# Altium PCB 6C-2L-1550um.PcbDoc (part 2 of 2)
Units mm, origin at the board's own origin, x right, y up, seen from the top; angles counter-clockwise.
Board outline 168.66 x 49.53 mm, 2 copper layers (Top Layer, Bottom Layer), stack 1.586 mm thick; 107 components, 120 nets, 578 pads, 231 vias.
Unrouted connection lines stored in the file: 1.
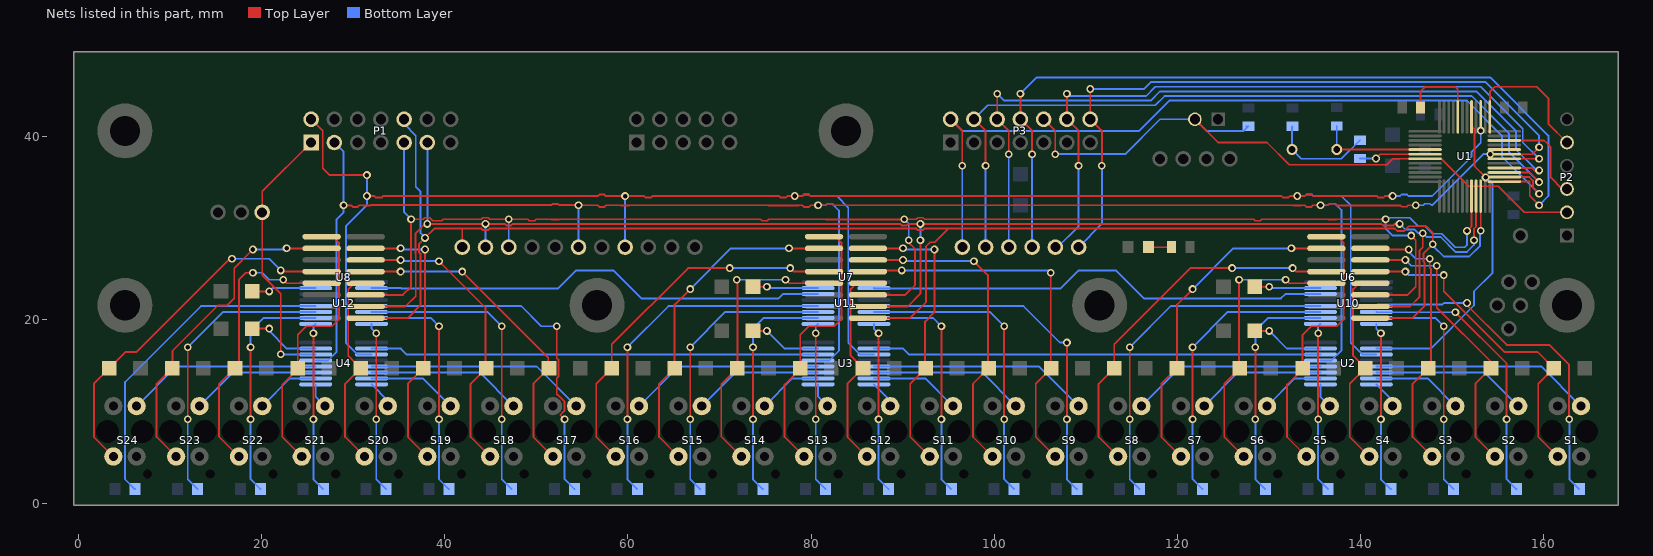
[diagram p2: the nets of this part, all layers, seen from the top]

## Via types
v1: diameter 0.85, hole 0.5, Top Layer to Bottom Layer, 231 vias

## Nets (pads, with @x,y where several pads share a name; then routed paths per layer and width w, separated by ;. In a path a pad name is that pad's centre, name@x,y a point inside that pad or via, vN(x,y) a via of type N, cw(c..) or ccw(c..) an arc to the next point about the centre after c; other vN are vias at no path point) (continued)
infra_OE: P1.3 pad.46 U1.32 U2.13 U3.13 U4.13 | length 203.2
  Top Layer w0.2: v1(28.956,32.512) 28.763,32.512 28.772,32.503 29.788,32.503 29.946,32.345 30.506,32.345 30.682,32.521 31.053,32.521 31.071,32.503 31.921,32.503 31.948,32.53 51.65,32.53 51.79,32.67 52.35,32.67 52.49,32.53 54.136,32.53 54.145,32.521 v1(54.61,32.521) 56.685,32.521 56.87,32.336 57.43,32.336 57.615,32.521 59.238,32.521 59.265,32.494 60.115,32.494 60.142,32.521 75.355,32.521 75.373,32.503 78.657,32.503 78.666,32.512 79.055,32.512 79.222,32.345 79.782,32.345 79.949,32.512 v1(80.772,32.512) 81.595,32.512 81.762,32.679 82.322,32.679 82.489,32.512 128.344,32.512 128.353,32.521 132.653,32.521 132.671,32.503 133.521,32.503 133.539,32.521 133.91,32.521 134.086,32.345 134.646,32.345 134.813,32.512 v1(135.636,32.512) 136.459,32.512 136.626,32.679 137.186,32.679 137.362,32.503 144.355,32.503 144.5,32.358 145.06,32.358 145.214,32.512 v1(146.05,32.512) ; v1(154.178,38.1) 154.674,38.596 U1.32@155.709,38.596
  Bottom Layer w0.2: U4.13@25.906,15.565 27.249,15.565 28.194,16.51 28.194,30.988 28.956,31.75 v1(28.956,32.512) 28.956,38.354 P1.3@27.94,39.37 ; pad.46@54.61,27.94 v1(54.61,32.521) ; U3.13@80.77,15.565 81.971,15.565 83.058,16.652 83.058,31.943 82.322,32.679 81.762,32.679 81.595,32.512 v1(80.772,32.512) ; U2.13@135.634,15.565 136.835,15.565 137.922,16.652 137.922,32.004 137.247,32.679 136.626,32.679 136.459,32.512 v1(135.636,32.512) ; v1(146.05,32.512) 146.873,32.512 147.04,32.679 147.6,32.679 147.767,32.512 147.828,32.512 153.416,38.1 v1(154.178,38.1)
infra_SCK: P1.2 pad.48 U1.39 U2.3 U3.3 U4.3 | length 217
  Top Layer w0.2: P1.2@25.4,41.91 26.67,40.64 26.67,36.576 27.432,35.814 v1(31.496,35.814) ; v1(31.496,33.528) 32.319,33.528 32.486,33.361 33.107,33.361 33.274,33.528 33.602,33.528 33.611,33.519 54.158,33.519 54.185,33.546 55.035,33.546 55.062,33.519 56.703,33.519 56.87,33.686 57.43,33.686 57.597,33.519 v1(59.69,33.519) 61.792,33.519 61.95,33.361 62.51,33.361 62.668,33.519 76.524,33.519 76.682,33.361 77.242,33.361 77.409,33.528 v1(78.232,33.528) 79.055,33.528 79.222,33.695 79.782,33.695 79.949,33.528 80.338,33.528 80.347,33.537 84.647,33.537 84.665,33.519 85.515,33.519 85.533,33.537 131.37,33.537 131.546,33.361 132.106,33.361 132.273,33.528 v1(133.096,33.528) 133.919,33.528 134.086,33.695 134.646,33.695 134.822,33.519 135.193,33.519 135.211,33.537 136.061,33.537 136.079,33.519 141.395,33.519 141.404,33.528 141.793,33.528 141.96,33.361 142.52,33.361 142.687,33.528 v1(143.51,33.528) ; v1(153.134,40.668) U1.39@153.134,42.171
  Bottom Layer w0.2: v1(31.496,35.814) v1(31.496,33.528) 31.496,32.512 29.21,30.226 29.21,17.526 30.521,16.215 U4.3@32.006,16.215 ; pad.48@59.69,27.94 v1(59.69,33.519) ; v1(78.232,33.528) 79.055,33.528 79.222,33.695 79.782,33.695 79.949,33.528 80.338,33.528 80.347,33.537 82.795,33.537 84.074,32.258 84.074,17.526 85.385,16.215 U3.3@86.87,16.215 ; v1(133.096,33.528) 133.919,33.528 134.086,33.695 134.707,33.695 134.865,33.537 136.122,33.537 136.131,33.528 137.922,33.528 138.938,32.512 138.938,17.526 140.249,16.215 U2.3@141.734,16.215 ; v1(143.51,33.528) 144.32,33.528 144.5,33.708 145.06,33.708 145.24,33.528 145.616,33.528 145.625,33.537 146.475,33.537 146.484,33.528 147.828,33.528 152.146,37.846 152.146,38.354 153.134,39.342 v1(153.134,40.668)
infra_SDO: U1.41 U2.2 | length 35
  Top Layer w0.2: U1.41@152.134,42.171 152.134,41.16 152.459,40.835 152.459,36.771 v1(153.67,35.56)
  Bottom Layer w0.2: U2.2@141.734,16.865 147.675,16.865 152.4,21.59 152.4,23.114 154.432,25.146 154.432,34.798 v1(153.67,35.56)
infra_SDO_to_front: P1.1 pad.40 U4.14 | length 30
  Top Layer w0.2: v1(22.098,16.256) 22.098,22.86 20.066,24.892 pad.40@20.066,31.75 20.066,34.036 P1.1@25.4,39.37
  Bottom Layer w0.2: v1(22.098,16.256) 22.139,16.215 U4.14@25.906,16.215
Main_MISO: P3.4 pad.12 U1.27 | length 86.6
  Top Layer w0.2: P3.4@97.79,41.91 99.06,40.64 v1(99.06,36.83) ; U1.27@155.709,36.096 158.468,36.096 v1(159.512,35.052)
  Bottom Layer w0.2: P3.4@97.79,41.91 99.314,43.434 117.602,43.434 118.618,44.45 152.146,44.45 156.21,40.386 156.21,38.354 v1(159.512,35.052) ; pad.12@99.06,27.94 v1(99.06,36.83)
Main_MOSI: P3.6 pad.13 U1.28 | length 85.9
  Top Layer w0.2: v1(100.33,44.704) P3.6@100.33,41.91 101.6,40.64 v1(101.6,38.1) ; U1.28@155.709,36.596 158.73,36.596 159.004,36.322 v1(159.512,36.322)
  Bottom Layer w0.2: v1(100.33,44.704) 101.092,43.942 117.094,43.942 118.11,44.958 152.654,44.958 156.972,40.64 156.972,38.608 159.258,36.322 v1(159.512,36.322) ; pad.13@101.6,27.94 v1(101.6,38.1)
Main_SCK: P3.2 pad.11 U1.26 | length 91.2
  Top Layer w0.2: P3.2@95.25,41.91 96.52,40.64 v1(96.52,36.83) ; U1.26@155.709,35.596 158.46,35.596 158.837,35.219 158.837,34.457 v1(159.512,33.782)
  Bottom Layer w0.2: P3.2@95.25,41.91 96.52,40.64 115.824,40.64 119.126,43.942 151.638,43.942 155.448,40.132 155.448,37.846 v1(159.512,33.782) ; pad.11@96.52,27.94 v1(96.52,36.83)
Main_SS: P3.8 pad.14 U1.25 | length 92.1
  Top Layer w0.2: v1(102.87,44.704) P3.8@102.87,41.91 104.14,40.64 v1(104.14,38.1) ; U1.25@155.709,35.096 158.452,35.096 158.487,35.061 158.487,33.537 v1(159.512,32.512)
  Bottom Layer w0.2: v1(102.87,44.704) 104.648,46.482 154.178,46.482 160.528,40.132 160.528,33.528 v1(159.512,32.512) ; pad.14@104.14,27.94 v1(104.14,38.1)
NetC1_1: C1.1 U1.5 X1.2 | length 12.2
  Top Layer w0.2: X1.2@137.414,38.608 137.426,38.596 U1.5@147.059,38.596
  Bottom Layer w0.2: X1.2@137.414,38.608 C1.1@137.414,41.18
NetC2_1: C2.1 R1.1 X1.1 | length 11.2
  Bottom Layer w0.2: C2.1@132.588,41.148 132.534,41.094 X1.1@132.534,38.608 133.55,37.592 137.922,37.592 R1.1@139.954,39.624
NetD1_2: D1.K U10.5 | length 38.1
  Top Layer w0.2: v1(151.638,21.844) 151.638,21.59 155.956,17.272 160.64,17.272 162.794,15.118 162.794,9.164 v1(162.814,9.144)
  Bottom Layer w0.2: U10.5@141.805,21.59 141.909,21.694 148.948,21.694 149.098,21.844 v1(151.638,21.844) ; v1(162.814,9.144) 162.814,2.608 D1.K@163.898,1.524
NetD2_2: D2.K U10.6 | length 30.7
  Top Layer w0.2: v1(150.368,20.828) 155.956,15.24 v1(155.956,9.144)
  Bottom Layer w0.2: U10.6@141.734,20.869 141.775,20.828 v1(150.368,20.828) ; v1(155.956,9.144) 155.956,2.608 D2.K@157.04,1.524
NetD3_2: D3.K U10.7 | length 26
  Top Layer w0.2: v1(149.098,9.144) v1(149.098,19.304)
  Bottom Layer w0.2: U10.7@141.734,20.219 148.183,20.219 v1(149.098,19.304) ; v1(149.098,9.144) 149.098,2.608 D3.K@150.182,1.524
NetD4_2: D4.K U10.8 | length 18.7
  Top Layer w0.2: v1(142.24,9.144) v1(142.24,18.542)
  Bottom Layer w0.2: U10.8@141.734,19.569 141.734,19.048 v1(142.24,18.542) ; v1(142.24,9.144) 142.24,2.608 D4.K@143.324,1.524
NetD5_2: D5.K U10.9 | length 18.6
  Top Layer w0.2: v1(135.382,9.144) v1(135.382,18.542)
  Bottom Layer w0.2: v1(135.382,9.144) 135.382,2.608 D5.K@136.466,1.524 ; v1(135.382,18.542) 135.382,19.317 U10.9@135.634,19.569
NetD6_2: D6.K U10.10 | length 25.4
  Top Layer w0.2: v1(128.524,9.144) v1(128.524,17.018)
  Bottom Layer w0.2: v1(128.524,9.144) 128.524,2.608 D6.K@129.608,1.524 ; v1(128.524,17.018) 128.524,18.796 129.947,20.219 U10.10@135.634,20.219
NetD7_2: D7.K U10.11 | length 31.5
  Top Layer w0.2: v1(121.666,9.144) v1(121.666,17.018)
  Bottom Layer w0.2: v1(121.666,9.144) 121.666,2.608 D7.K@122.75,1.524 ; v1(121.666,17.018) 125.517,20.869 U10.11@135.634,20.869
NetD8_2: D8.K U10.12 | length 38.6
  Top Layer w0.2: v1(114.808,9.144) v1(114.808,17.018)
  Bottom Layer w0.2: v1(114.808,9.144) 114.808,2.608 D8.K@115.892,1.524 ; v1(114.808,17.018) 119.309,21.519 U10.12@135.634,21.519
NetD9_2: D9.K U11.5 | length 39.2
  Top Layer w0.2: v1(107.95,9.144) v1(107.95,17.526)
  Bottom Layer w0.2: U11.5@86.87,21.519 103.195,21.519 107.188,17.526 v1(107.95,17.526) ; v1(107.95,9.144) 107.95,2.608 D9.K@109.034,1.524
NetD10_2: D10.K U11.6 | length 33.1
  Top Layer w0.2: v1(101.092,9.144) v1(101.092,19.304)
  Bottom Layer w0.2: U11.6@86.87,20.869 99.527,20.869 v1(101.092,19.304) ; v1(101.092,9.144) 101.092,2.608 D10.K@102.176,1.524
NetD11_2: D11.K U11.7 | length 26
  Top Layer w0.2: v1(94.234,9.144) v1(94.234,19.304)
  Bottom Layer w0.2: U11.7@86.87,20.219 93.319,20.219 v1(94.234,19.304) ; v1(94.234,9.144) 94.234,2.608 D11.K@95.318,1.524
NetD12_2: D12.K U11.8 | length 18.7
  Top Layer w0.2: v1(87.376,9.144) v1(87.376,18.542)
  Bottom Layer w0.2: U11.8@86.87,19.569 86.87,19.048 v1(87.376,18.542) ; v1(87.376,9.144) 87.376,2.608 D12.K@88.46,1.524
NetD13_2: D13.K U11.9 | length 18.6
  Top Layer w0.2: v1(80.518,9.144) v1(80.518,18.542)
  Bottom Layer w0.2: v1(80.518,9.144) 80.518,2.608 D13.K@81.602,1.524 ; v1(80.518,18.542) 80.518,19.317 U11.9@80.77,19.569
NetD14_2: D14.K U11.10 | length 25.6
  Top Layer w0.2: v1(73.66,9.144) v1(73.66,17.018)
  Bottom Layer w0.2: v1(73.66,9.144) 73.66,2.608 D14.K@74.744,1.524 ; v1(73.66,17.018) 73.66,19.05 74.829,20.219 U11.10@80.77,20.219
NetD15_2: D15.K U11.11 | length 31.5
  Top Layer w0.2: v1(66.802,9.144) v1(66.802,17.018)
  Bottom Layer w0.2: v1(66.802,9.144) 66.802,2.608 D15.K@67.886,1.524 ; v1(66.802,17.018) 70.653,20.869 U11.11@80.77,20.869
NetD16_2: D16.K U11.12 | length 38.6
  Top Layer w0.2: v1(59.944,9.144) v1(59.944,17.018)
  Bottom Layer w0.2: v1(59.944,9.144) 59.944,2.608 D16.K@61.028,1.524 ; v1(59.944,17.018) 64.445,21.519 U11.12@80.77,21.519
NetD17_2: D17.K U12.5 | length 40.4
  Top Layer w0.2: v1(52.237,19.304) 52.237,15.782 52.29,15.782 52.436,15.636 52.436,13.828 52.29,13.682 52.237,13.682 52.237,11.83 52.334,11.83 53.066,11.098 53.066,10.062 52.617,9.613 v1(53.086,9.144)
  Bottom Layer w0.2: U12.5@32.006,21.519 48.331,21.519 50.546,19.304 v1(52.237,19.304) ; v1(53.086,9.144) 53.086,2.608 D17.K@54.17,1.524
NetD18_2: D18.K U12.6 | length 33.1
  Top Layer w0.2: v1(46.228,9.144) v1(46.228,19.304)
  Bottom Layer w0.2: U12.6@32.006,20.869 44.663,20.869 v1(46.228,19.304) ; v1(46.228,9.144) 46.228,2.608 D18.K@47.312,1.524
NetD19_2: D19.K U12.7 | length 26
  Top Layer w0.2: v1(39.37,9.144) v1(39.37,19.304)
  Bottom Layer w0.2: U12.7@32.006,20.219 38.455,20.219 v1(39.37,19.304) ; v1(39.37,9.144) 39.37,2.608 D19.K@40.454,1.524
NetD20_2: D20.K U12.8 | length 18.7
  Top Layer w0.2: v1(32.512,9.144) v1(32.512,18.542)
  Bottom Layer w0.2: U12.8@32.006,19.569 32.006,19.048 v1(32.512,18.542) ; v1(32.512,9.144) 32.512,2.608 D20.K@33.596,1.524
NetD21_2: D21.K U12.9 | length 18.6
  Top Layer w0.2: v1(25.654,9.144) v1(25.654,18.542)
  Bottom Layer w0.2: v1(25.654,9.144) 25.654,2.608 D21.K@26.738,1.524 ; v1(25.654,18.542) 25.654,19.317 U12.9@25.906,19.569
NetD22_2: D22.K U12.10 | length 25.4
  Top Layer w0.2: v1(18.796,9.144) v1(18.796,17.018)
  Bottom Layer w0.2: v1(18.796,9.144) 18.796,2.608 D22.K@19.88,1.524 ; v1(18.796,17.018) 18.796,18.796 20.219,20.219 U12.10@25.906,20.219
NetD23_2: D23.K U12.11 | length 31.5
  Top Layer w0.2: v1(11.938,9.144) v1(11.938,17.018)
  Bottom Layer w0.2: v1(11.938,9.144) 11.938,2.608 D23.K@13.022,1.524 ; v1(11.938,17.018) 15.789,20.869 U12.11@25.906,20.869
NetD24_2: D24.K U12.12 | length 36.4
  Bottom Layer w0.2: D24.K@6.164,1.524 5.08,2.608 5.08,13.208 13.391,21.519 U12.12@25.906,21.519
NetD25_1: D25.A R9.1 | length 2.5
  Top Layer w0.2: D25.A@116.84,27.94 R9.1@119.38,27.94
NetR1_2: R1.2 U1.6 | length 7.3
  Top Layer w0.2: v1(141.7,37.624) 142.172,38.096 U1.6@147.059,38.096
  Bottom Layer w0.2: R1.2@139.954,37.624 v1(141.7,37.624)
NetR2_2: R2.2 U2.15 | length 8
  Top Layer w0.2: R2.2@128.446,18.796 v1(130.048,18.796)
  Bottom Layer w0.2: v1(130.048,18.796) 131.979,16.865 U2.15@135.634,16.865
NetR3_2: R3.2 U3.15 | length 7.9
  Top Layer w0.2: R3.2@73.66,18.796 v1(75.184,18.796)
  Bottom Layer w0.2: v1(75.184,18.796) 77.115,16.865 U3.15@80.77,16.865
NetR4_2: R4.2 U4.15 | length 8
  Top Layer w0.2: R4.2@18.972,19.05 v1(20.828,19.05)
  Bottom Layer w0.2: v1(20.828,19.05) 20.828,18.796 22.759,16.865 U4.15@25.906,16.865
NetR5_1: R5.1 U1.44 | length 9.2
  Top Layer w0.2: R5.1@146.558,43.18 146.558,44.958 147.066,45.466 150.368,45.466 150.634,45.2 U1.44@150.634,42.171
NetR6_2: R6.2 U10.15 | length 7.3
  Top Layer w0.2: R6.2@128.446,23.622 v1(130.048,23.622)
  Bottom Layer w0.2: v1(130.048,23.622) 130.201,23.469 U10.15@135.634,23.469
NetR7_2: R7.2 U11.15 | length 7.2
  Top Layer w0.2: R7.2@73.66,23.622 v1(75.184,23.622)
  Bottom Layer w0.2: v1(75.184,23.622) 75.337,23.469 U11.15@80.77,23.469
NetR8_2: R8.2 U12.15 | length 7.1
  Top Layer w0.2: R8.2@18.972,23.114 v1(20.828,23.114)
  Bottom Layer w0.2: v1(20.828,23.114) 21.183,23.469 U12.15@25.906,23.469
NetR10_1: R10.1 S1.3 U6.13 | length 36.7
  Top Layer w0.2: U6.13@141.084,25.273 v1(144.907,25.273) ; v1(149.098,24.892) 149.098,23.114 155.702,16.51 159.336,16.51 R10.1@161.114,14.732 159.414,13.032 159.414,7.209 S1.3@161.544,5.08 S1.3@161.544,5.08
  Bottom Layer w0.2: v1(144.907,25.273) 145.288,24.892 v1(149.098,24.892)
NetR11_1: R11.1 S2.3 U6.14 | length 32.4
  Top Layer w0.2: U6.14@141.084,26.543 v1(144.907,26.543) ; v1(148.336,25.908) 148.336,21.336 154.256,15.416 R11.1@154.256,14.732 152.556,13.032 152.556,7.209 S2.3@154.686,5.08 S2.3@154.686,5.08
  Bottom Layer w0.2: v1(144.907,26.543) 145.542,25.908 v1(148.336,25.908)
NetR12_1: R12.1 S3.3 U6.15 | length 30.7
  Top Layer w0.2: U6.15@141.084,27.813 140.957,27.686 v1(145.288,27.686) ; v1(147.574,26.67) 147.574,25.715 147.701,25.588 147.701,15.035 145.698,13.032 145.698,7.209 S3.3@147.828,5.08 S3.3@147.828,5.08
  Bottom Layer w0.2: v1(145.288,27.686) 145.288,27.432 146.05,26.67 v1(147.574,26.67)
NetR13_1: R13.1 S4.3 U6.12 | length 22.6
  Top Layer w0.2: S4.3@140.97,5.08 S4.3@140.97,5.08 138.84,7.209 138.84,13.032 R13.1@140.54,14.732 139.192,16.08 139.192,23.368 139.827,24.003 U6.12@141.084,24.003
NetR14_1: R14.1 S5.3 U6.1 | length 30.6
  Top Layer w0.2: R14.1@133.682,14.732 133.682,18.366 134.62,19.304 137.414,19.304 138.176,20.066 138.176,28.448 137.541,29.083 U6.1@136.284,29.083 ; R14.1@133.731,14.683 131.982,12.934 131.982,7.209 S5.3@134.112,5.08 S5.3@134.112,5.08
NetR15_1: R15.1 S6.3 U6.5 | length 30.6
  Top Layer w0.2: v1(126.746,24.384) 126.746,14.81 R15.1@126.824,14.732 125.124,13.032 125.124,7.209 S6.3@127.254,5.08 S6.3@127.254,5.08 ; v1(131.826,24.384) 132.207,24.003 U6.5@136.284,24.003
  Bottom Layer w0.2: v1(126.746,24.384) v1(131.826,24.384)
NetR16_1: R16.1 S7.3 U6.2 | length 37
  Top Layer w0.2: S7.3@120.396,5.08 S7.3@120.396,5.08 118.266,7.209 118.266,13.032 R16.1@119.966,14.732 119.966,21.668 v1(121.666,23.368) ; v1(132.461,27.813) U6.2@136.284,27.813
  Bottom Layer w0.2: v1(121.666,23.368) 126.111,27.813 v1(132.461,27.813)
NetR17_1: R17.1 S8.3 U6.4 | length 40.9
  Top Layer w0.2: S8.3@113.538,5.08 S8.3@113.538,5.08 111.408,7.209 111.408,13.032 R17.1@113.108,14.732 113.108,17.326 121.436,25.654 v1(125.984,25.654) ; v1@132.588,25.4 v1(132.588,25.654) 132.969,25.273 U6.4@136.284,25.273
  Bottom Layer w0.2: v1(125.984,25.654) v1(132.588,25.654)
NetR18_1: R18.1 S9.3 U7.13 | length 41.8
  Top Layer w0.2: U7.13@86.22,25.273 86.347,25.4 v1(89.916,25.4) ; v1(106.172,25.146) 106.172,14.732 R18.1@106.25,14.732 104.55,13.032 104.55,7.209 S9.3@106.68,5.08 S9.3@106.68,5.08
  Bottom Layer w0.2: v1(89.916,25.4) 105.918,25.4 v1(106.172,25.146)
NetR19_1: R19.1 S10.3 U7.14 | length 35.1
  Top Layer w0.2: U7.14@86.22,26.543 v1(90.043,26.543) ; v1(97.79,26.416) 99.314,24.892 99.314,14.654 97.692,13.032 97.692,7.209 S10.3@99.822,5.08 S10.3@99.822,5.08
  Bottom Layer w0.2: v1(90.043,26.543) 90.17,26.416 v1(97.79,26.416)
NetR20_1: R20.1 S11.3 U7.15 | length 31.9
  Top Layer w0.2: U7.15@86.22,27.813 v1(90.043,27.813) ; S11.3@92.964,5.08 S11.3@92.964,5.08 90.834,7.209 90.834,13.032 92.456,14.654 92.456,19.812 93.472,20.828 v1(93.472,27.686)
  Bottom Layer w0.2: v1(90.043,27.813) 90.17,27.686 v1(93.472,27.686)
NetR21_1: R21.1 S12.3 U7.12 | length 22.6
  Top Layer w0.2: S12.3@86.106,5.08 S12.3@86.106,5.08 83.976,7.209 83.976,13.032 R21.1@85.676,14.732 84.328,16.08 84.328,23.368 84.963,24.003 U7.12@86.22,24.003
NetR22_1: R22.1 S13.3 U7.1 | length 30.6
  Top Layer w0.2: R22.1@78.818,14.732 78.818,18.366 79.756,19.304 82.55,19.304 83.312,20.066 83.312,28.448 82.677,29.083 U7.1@81.42,29.083 ; R22.1@78.867,14.683 77.118,12.934 77.118,7.209 S13.3@79.248,5.08 S13.3@79.248,5.08
NetR23_1: R23.1 S14.3 U7.5 | length 30.7
  Top Layer w0.2: v1(71.882,24.384) 71.96,24.306 R23.1@71.96,14.732 70.202,12.974 70.202,7.267 S14.3@72.39,5.08 S14.3@72.39,5.08 ; v1(77.216,24.384) 77.597,24.003 U7.5@81.42,24.003
  Bottom Layer w0.2: v1(71.882,24.384) v1(77.216,24.384)
NetR24_1: R24.1 S15.3 U7.2 | length 37
  Top Layer w0.2: S15.3@65.532,5.08 S15.3@65.532,5.08 63.402,7.209 63.402,13.032 R24.1@65.102,14.732 65.102,21.668 v1(66.802,23.368) ; v1(77.597,27.813) U7.2@81.42,27.813
  Bottom Layer w0.2: v1(66.802,23.368) 71.247,27.813 v1(77.597,27.813)
NetR25_1: R25.1 S16.3 U7.4 | length 40.9
  Top Layer w0.2: S16.3@58.674,5.08 S16.3@58.674,5.08 56.544,7.209 56.544,13.032 R25.1@58.244,14.732 58.244,17.326 66.572,25.654 v1(71.12,25.654) ; v1@77.724,25.4 v1(77.724,25.654) 78.105,25.273 U7.4@81.42,25.273
  Bottom Layer w0.2: v1(71.12,25.654) v1(77.724,25.654)
NetR26_1: R26.1 S17.3 U8.13 | length 36.4
  Top Layer w0.2: U8.13@31.356,25.273 v1(35.179,25.273) ; v1(41.91,25.273) 51.308,15.875 51.308,15.24 51.601,14.947 R26.1@51.386,14.732 49.686,13.032 49.686,7.209 S17.3@51.816,5.08 S17.3@51.816,5.08
  Bottom Layer w0.2: v1(35.179,25.273) v1(41.91,25.273)
NetR27_1: R27.1 S18.3 U8.14 | length 33.3
  Top Layer w0.2: U8.14@31.356,26.543 v1(35.179,26.543) ; v1(39.37,26.416) 44.45,21.336 44.45,15.179 44.712,14.916 R27.1@44.528,14.732 42.828,13.032 42.828,7.209 S18.3@44.958,5.08 S18.3@44.958,5.08
  Bottom Layer w0.2: v1(35.179,26.543) 35.306,26.416 v1(39.37,26.416)
NetR28_1: R28.1 S19.3 U8.15 | length 31.2
  Top Layer w0.2: U8.15@31.356,27.813 v1(35.179,27.813) ; v1(37.846,27.686) 37.846,14.556 R28.1@37.67,14.732 35.97,13.032 35.97,7.209 S19.3@38.1,5.08 S19.3@38.1,5.08
  Bottom Layer w0.2: v1(35.179,27.813) 35.306,27.686 v1(37.846,27.686)
NetR29_1: R29.1 S20.3 U8.12 | length 22.6
  Top Layer w0.2: S20.3@31.242,5.08 S20.3@31.242,5.08 29.112,7.209 29.112,13.032 R29.1@30.812,14.732 29.464,16.08 29.464,23.368 30.099,24.003 U8.12@31.356,24.003
NetR30_1: R30.1 S21.3 U8.1 | length 30.6
  Top Layer w0.2: R30.1@23.954,14.732 23.954,18.366 24.892,19.304 27.686,19.304 28.448,20.066 28.448,28.448 27.813,29.083 U8.1@26.556,29.083 ; R30.1@24.003,14.683 22.254,12.934 22.254,7.209 S21.3@24.384,5.08 S21.3@24.384,5.08
NetR31_1: R31.1 S22.3 U8.5 | length 30.4
  Top Layer w0.2: R31.1@16.849,14.485 15.338,12.974 15.338,7.267 S22.3@17.526,5.08 S22.3@17.526,5.08 ; R31.1@17.272,15.051 17.526,15.305 17.526,24.384 18.288,25.146 v1(19.05,25.146) ; v1@22.352,24.13 v1(22.352,24.384) 22.733,24.003 U8.5@26.556,24.003
  Bottom Layer w0.2: v1(19.05,25.146) 20.066,25.146 20.828,24.384 v1(22.352,24.384)
NetR32_1: R32.1 S23.3 U8.2 | length 36
  Top Layer w0.2: S23.3@10.668,5.08 S23.3@10.668,5.08 8.538,7.209 8.538,13.032 10.256,14.75 10.256,16.606 15.24,21.59 16.256,21.59 17.018,22.352 17.018,25.654 v1(19.05,27.686) ; v1(22.733,27.813) U8.2@26.556,27.813
  Bottom Layer w0.2: v1(19.05,27.686) 22.606,27.686 v1(22.733,27.813)
NetR33_1: R33.1 S24.3 U8.4 | length 39.9
  Top Layer w0.2: S24.3@3.81,5.08 S24.3@3.81,5.08 1.68,7.209 1.68,13.032 5.158,16.51 6.35,16.51 16.51,26.67 v1(16.764,26.67) ; v1(22.098,25.4) 22.225,25.273 U8.4@26.556,25.273
  Bottom Layer w0.2: v1(16.764,26.67) 20.828,26.67 v1(22.098,25.4)
NetS1_2: S1.2 U2.5 | length 24.1
  Bottom Layer w0.2: U2.5@141.734,14.915 159.749,14.915 S1.2@164.084,10.58
NetS2_2: S2.2 U2.6 | length 17
  Bottom Layer w0.2: U2.6@141.734,14.265 153.541,14.265 S2.2@157.226,10.58
NetS3_2: S3.2 U2.7 | length 9.9
  Bottom Layer w0.2: U2.7@141.734,13.615 147.333,13.615 S3.2@150.368,10.58
NetS4_2: S4.2 U2.8 | length 3.1
  Bottom Layer w0.2: U2.8@141.734,12.965 143.51,11.189 S4.2@143.51,10.58
NetS5_2: S5.2 U2.9 | length 2.8
  Bottom Layer w0.2: U2.9@135.634,12.965 135.634,11.598 S5.2@136.652,10.58
NetS6_2: S6.2 U2.10 | length 7.1
  Bottom Layer w0.2: S6.2@129.794,10.58 132.829,13.615 U2.10@135.634,13.615
NetS7_2: S7.2 U2.11 | length 14.2
  Bottom Layer w0.2: S7.2@122.936,10.58 126.621,14.265 U2.11@135.634,14.265
NetS8_2: S8.2 U2.12 | length 21.4
  Bottom Layer w0.2: S8.2@116.078,10.58 120.413,14.915 U2.12@135.634,14.915
NetS9_2: S9.2 U3.5 | length 24.1
  Bottom Layer w0.2: U3.5@86.87,14.915 104.885,14.915 S9.2@109.22,10.58
NetS10_2: S10.2 U3.6 | length 17
  Bottom Layer w0.2: U3.6@86.87,14.265 98.677,14.265 S10.2@102.362,10.58
NetS11_2: S11.2 U3.7 | length 9.9
  Bottom Layer w0.2: U3.7@86.87,13.615 92.469,13.615 S11.2@95.504,10.58
NetS12_2: S12.2 U3.8 | length 3.1
  Bottom Layer w0.2: U3.8@86.87,12.965 88.646,11.189 S12.2@88.646,10.58
NetS13_2: S13.2 U3.9 | length 2.8
  Bottom Layer w0.2: U3.9@80.77,12.965 80.77,11.598 S13.2@81.788,10.58
NetS14_2: S14.2 U3.10 | length 7.1
  Bottom Layer w0.2: S14.2@74.93,10.58 77.965,13.615 U3.10@80.77,13.615
NetS15_2: S15.2 U3.11 | length 14.2
  Bottom Layer w0.2: S15.2@68.072,10.58 71.757,14.265 U3.11@80.77,14.265
NetS16_2: S16.2 U3.12 | length 21.4
  Bottom Layer w0.2: S16.2@61.214,10.58 65.549,14.915 U3.12@80.77,14.915
NetS17_2: S17.2 U4.5 | length 24.1
  Bottom Layer w0.2: U4.5@32.006,14.915 50.021,14.915 S17.2@54.356,10.58
NetS18_2: S18.2 U4.6 | length 17
  Bottom Layer w0.2: U4.6@32.006,14.265 43.813,14.265 S18.2@47.498,10.58
NetS19_2: S19.2 U4.7 | length 9.9
  Bottom Layer w0.2: U4.7@32.006,13.615 37.605,13.615 S19.2@40.64,10.58
NetS20_2: S20.2 U4.8 | length 3.1
  Bottom Layer w0.2: U4.8@32.006,12.965 33.782,11.189 S20.2@33.782,10.58
NetS21_2: S21.2 U4.9 | length 2.8
  Bottom Layer w0.2: U4.9@25.906,12.965 25.906,11.598 S21.2@26.924,10.58
NetS22_2: S22.2 U4.10 | length 7.1
  Bottom Layer w0.2: S22.2@20.066,10.58 23.101,13.615 U4.10@25.906,13.615
NetS23_2: S23.2 U4.11 | length 14.2
  Bottom Layer w0.2: S23.2@13.208,10.58 16.893,14.265 U4.11@25.906,14.265
NetS24_2: S24.2 U4.12 | length 21.4
  Bottom Layer w0.2: S24.2@6.35,10.58 10.685,14.915 U4.12@25.906,14.915
NetU2_14: U2.14 U3.2 | length 49
  Bottom Layer w0.2: U3.2@86.87,16.865 90.069,16.865 90.719,16.215 U2.14@135.634,16.215
NetU3_14: U3.14 U4.2 | length 49
  Bottom Layer w0.2: U4.2@32.006,16.865 35.205,16.865 35.855,16.215 U3.14@80.77,16.215
NetU10_14: U10.14 U11.2 | length 51
  Bottom Layer w0.2: U11.2@86.87,23.469 86.906,23.433 107.253,23.433 109.22,25.4 113.284,25.4 116.332,22.352 131.318,22.352 131.785,22.819 U10.14@135.634,22.819
NetU11_14: U11.14 U12.2 | length 51
  Bottom Layer w0.2: U12.2@32.006,23.469 35.222,23.469 35.258,23.433 52.389,23.433 54.356,25.4 58.42,25.4 61.468,22.352 76.454,22.352 76.921,22.819 U11.14@80.77,22.819
NRST: C3.2 P2.2 P3.10 P4.2 U1.7 | length 73.4
  Top Layer w0.2: P3.10@105.41,41.91 106.68,40.64 v1(106.68,38.1) ; P4.2@121.92,41.91 124.46,39.37 129.794,39.37 132.215,36.949 142.867,36.949 143.514,37.596 U1.7@147.059,37.596 148.84,37.596 151.84,34.596 155.067,34.596 157.913,31.75 P2.2@162.56,31.75
  Bottom Layer w0.2: v1(106.68,38.1) 114.3,38.1 118.11,41.91 P4.2@121.92,41.91 123.19,40.64 127.254,40.64 C3.2@127.762,41.148 C3.2@127.508,41.148
SELECT0: P1.9 pad.43 U1.20 U6.11 U7.11 U8.11 | length 176.3
  Top Layer w0.2: U8.11@31.356,22.733 35.433,22.733 36.322,23.622 v1(36.322,30.988) 37.653,30.988 37.82,31.155 38.38,31.155 38.714,30.821 39.65,30.821 39.817,30.988 44.003,30.988 44.17,31.155 44.73,31.155 44.897,30.988 v1(46.99,30.988) 49.092,30.988 49.25,30.83 49.81,30.83 49.968,30.988 51.627,30.988 51.645,30.97 52.495,30.97 52.513,30.988 74.483,30.988 74.65,30.821 75.21,30.821 75.377,30.988 81.608,30.988 81.617,30.979 90.161,30.979 v1(90.17,30.988) 91.501,30.988 91.668,31.155 92.228,31.155 92.395,30.988 128.331,30.988 128.498,30.821 129.058,30.821 129.225,30.988 136.472,30.988 136.481,30.979 137.331,30.979 137.34,30.988 v1(142.748,30.988) ; U7.11@86.22,22.733 90.297,22.733 91.353,23.789 91.353,27.773 90.678,28.448 v1(90.678,28.702) ; U6.11@141.084,22.733 145.161,22.733 146.05,23.622 146.05,28.702 v1(145.542,29.21) ; v1(151.638,29.718) 152.134,30.214 U1.20@152.134,33.521 U1.20@152.146,33.509
  Bottom Layer w0.2: P1.9@35.56,39.37 35.56,31.75 v1(36.322,30.988) ; pad.43@46.99,27.94 v1(46.99,30.988) ; v1(90.17,30.988) 90.678,30.48 v1(90.678,28.702) ; v1(145.542,29.21) 143.51,29.21 142.748,29.972 v1(142.748,30.988) 142.915,31.155 145.375,31.155 146.295,30.235 147.057,30.235 147.89,29.402 148.893,29.402 150.355,27.94 151.384,27.94 151.638,28.194 v1(151.638,29.718)
SELECT1: P1.11 pad.42 U1.21 U6.10 U7.10 U8.10 | length 175.4
  Top Layer w0.2: U8.10@31.356,21.463 35.687,21.463 36.83,22.606 36.83,27.252 36.821,27.261 36.821,29.455 37.846,30.48 v1(38.1,30.48) 38.109,30.471 39.795,30.471 39.804,30.48 v1(44.45,30.48) 46.543,30.48 46.71,30.313 47.27,30.313 47.437,30.48 74.496,30.48 74.505,30.471 75.355,30.471 75.364,30.48 75.766,30.48 75.775,30.471 76.625,30.471 76.634,30.48 78.306,30.48 78.315,30.471 79.165,30.471 79.174,30.48 89.723,30.48 89.89,30.313 90.45,30.313 90.617,30.48 v1(91.948,30.48) 128.344,30.48 128.353,30.471 129.203,30.471 129.212,30.48 142.301,30.48 142.468,30.313 143.597,30.313 143.764,30.48 v1(144.272,30.48) ; U7.10@86.22,21.463 90.551,21.463 91.948,22.86 v1(91.948,28.702) ; U6.10@141.084,21.463 145.415,21.463 146.462,22.51 146.462,27.59 146.812,27.94 v1(146.812,29.464) v1@146.558,29.464 ; v1(152.4,28.702) 152.4,29.967 152.634,30.201 U1.21@152.634,33.521 U1.21@152.654,33.501
  Bottom Layer w0.2: v1(38.1,30.48) P1.11@38.1,39.37 ; pad.42@44.45,27.94 v1(44.45,30.48) ; v1(91.948,28.702) v1(91.948,30.48) ; v1(144.272,30.48) 144.867,29.885 145.883,29.885 146.304,29.464 v1@146.685,29.464 ; v1(152.4,28.702) 152.4,28.194 151.638,27.432 150.368,27.432 148.748,29.052 147.863,29.052 147.854,29.043 147.233,29.043 v1(146.812,29.464) ; v1@146.685,29.464 v1(146.812,29.464) ; v1@146.685,29.464 146.685,29.337 v1(146.812,29.464) ; v1@146.685,29.464 146.685,29.591 v1(146.812,29.464)
SELECT2: P1.10 pad.41 U1.22 U6.9 U7.9 U8.9 | length 184.8
  Top Layer w0.2: U8.9@31.356,20.193 35.941,20.193 37.338,21.59 37.338,27.239 37.171,27.406 37.171,28.281 v1(37.846,28.956) 38.862,29.972 41.91,29.972 ; pad.41@41.91,27.94 41.91,29.972 ; U7.9@86.22,20.193 90.805,20.193 92.557,21.945 92.557,28.041 93.004,28.488 93.512,28.488 94.987,29.963 ; 94.996,29.963 94.987,29.963 ; U6.9@141.084,20.193 145.669,20.193 146.986,21.51 146.986,26.303 146.899,26.39 146.899,27.265 v1(147.892,28.258) 147.892,29.527 147.193,30.226 145.288,30.226 144.78,29.718 144.018,29.718 143.764,29.972 143.751,29.972 143.742,29.963 142.323,29.963 142.314,29.972 94.996,29.972 94.987,29.963 ; v1(153.134,29.746) U1.22@153.134,33.521 U1.22@153.162,33.493 ; 41.91,29.972 44.003,29.972 44.17,29.805 44.73,29.805 44.897,29.972 46.556,29.972 46.565,29.963 47.415,29.963 47.424,29.972 89.736,29.972 89.745,29.963 91.51,29.963 91.668,29.805 92.228,29.805 92.386,29.963 94.987,29.963
  Bottom Layer w0.2: P1.10@35.56,41.91 35.56,41.402 36.83,40.132 36.83,34.544 37.338,34.036 37.338,29.525 37.846,29.017 v1(37.846,28.956) ; v1(147.892,28.258) v1@148.018,28.258 ; v1@148.082,28.194 v1@148.018,28.258 ; v1(153.134,29.746) 153.075,29.687 153.075,28.107 151.892,26.924 149.098,26.924 148.018,28.003 v1@148.018,28.258
SWCLK: P2.5 U1.37 | length 15.6
  Top Layer w0.2: U1.37@154.134,42.171 154.134,44.914 154.686,45.466 159.258,45.466 160.528,44.196 160.528,41.402 P2.5@162.56,39.37
SWDIO: P2.3 U1.34 | length 11
  Top Layer w0.2: U1.34@155.737,39.624 U1.34@155.709,39.596 160.048,39.596 160.782,38.862 160.782,35.56 162.052,34.29 P2.3@162.56,34.29
UART_RX: P3.14 pad.16 U1.31 | length 76
  Top Layer w0.2: v1(110.49,45.212) P3.14@110.49,41.91 111.76,40.64 v1(111.76,36.83) ; U1.31@155.709,38.096 158.746,38.096 v1(159.512,38.862)
  Bottom Layer w0.2: pad.16@109.22,27.94 111.76,30.48 v1(111.76,36.83) ; v1(110.49,45.212) 116.332,45.212 117.094,45.974 153.67,45.974 159.512,40.132 v1(159.512,38.862)
UART_TX: P3.12 pad.15 U1.30 | length 78.5
  Top Layer w0.2: v1(107.95,44.704) P3.12@107.95,41.91 109.22,40.64 v1(109.22,36.83) ; U1.30@155.709,37.596 v1(159.508,37.596)
  Bottom Layer w0.2: pad.15@106.807,27.813 109.22,30.226 v1(109.22,36.83) ; v1(107.95,44.704) 108.204,44.45 116.586,44.45 117.602,45.466 153.162,45.466 157.734,40.894 157.734,39.37 v1(159.508,37.596)
pads on no net: P2.1 P2.6 S1.MH1 S1.MH2 S1.MH3 S2.MH1 S2.MH2 S2.MH3 S3.MH1 S3.MH2 S3.MH3 S4.MH1 S4.MH2 S4.MH3 S5.MH1 S5.MH2 S5.MH3 S6.MH1 S6.MH2 S6.MH3 S7.MH1 S7.MH2 S7.MH3 S8.MH1 S8.MH2 S8.MH3 S9.MH1 S9.MH2 S9.MH3 S10.MH1 S10.MH2 S10.MH3 S11.MH1 S11.MH2 S11.MH3 S12.MH1 S12.MH2 S12.MH3 S13.MH1 S13.MH2 S13.MH3 S14.MH1 S14.MH2 S14.MH3 S15.MH1 S15.MH2 S15.MH3 S16.MH1 S16.MH2 S16.MH3 S17.MH1 S17.MH2 S17.MH3 S18.MH1 S18.MH2 S18.MH3 S19.MH1 S19.MH2 S19.MH3 S20.MH1 S20.MH2 S20.MH3 S21.MH1 S21.MH2 S21.MH3 S22.MH1 S22.MH2 S22.MH3 S23.MH1 S23.MH2 S23.MH3 S24.MH1 S24.MH2 S24.MH3 U1.2 U1.3 U1.4 U1.18 U1.38 U1.40 U1.46

## Polygon pours and split planes (outlines as drawn)
GND on Top Layer "Top Layer-No Net" (solid, remove dead copper, pour order 0): 0.254,48.514 0.254,0.508 167.386,0.508 167.386,48.514
3V3 on Bottom Layer "Top Layer-No Net" (solid, remove dead copper, pour order 2): 0.254,48.514 0.508,0.508 167.386,0.508 167.386,48.514

## Silkscreen, mask and mechanical layers (free items; w line width, h text height)
Top Overlay:
  text "Ikarosz" at 9.144,47.244 h10 r270
Mechanical 1:
  the board outline again, w0.508